# EAGLE board circuitdraft (EAGLE 9.5.1)
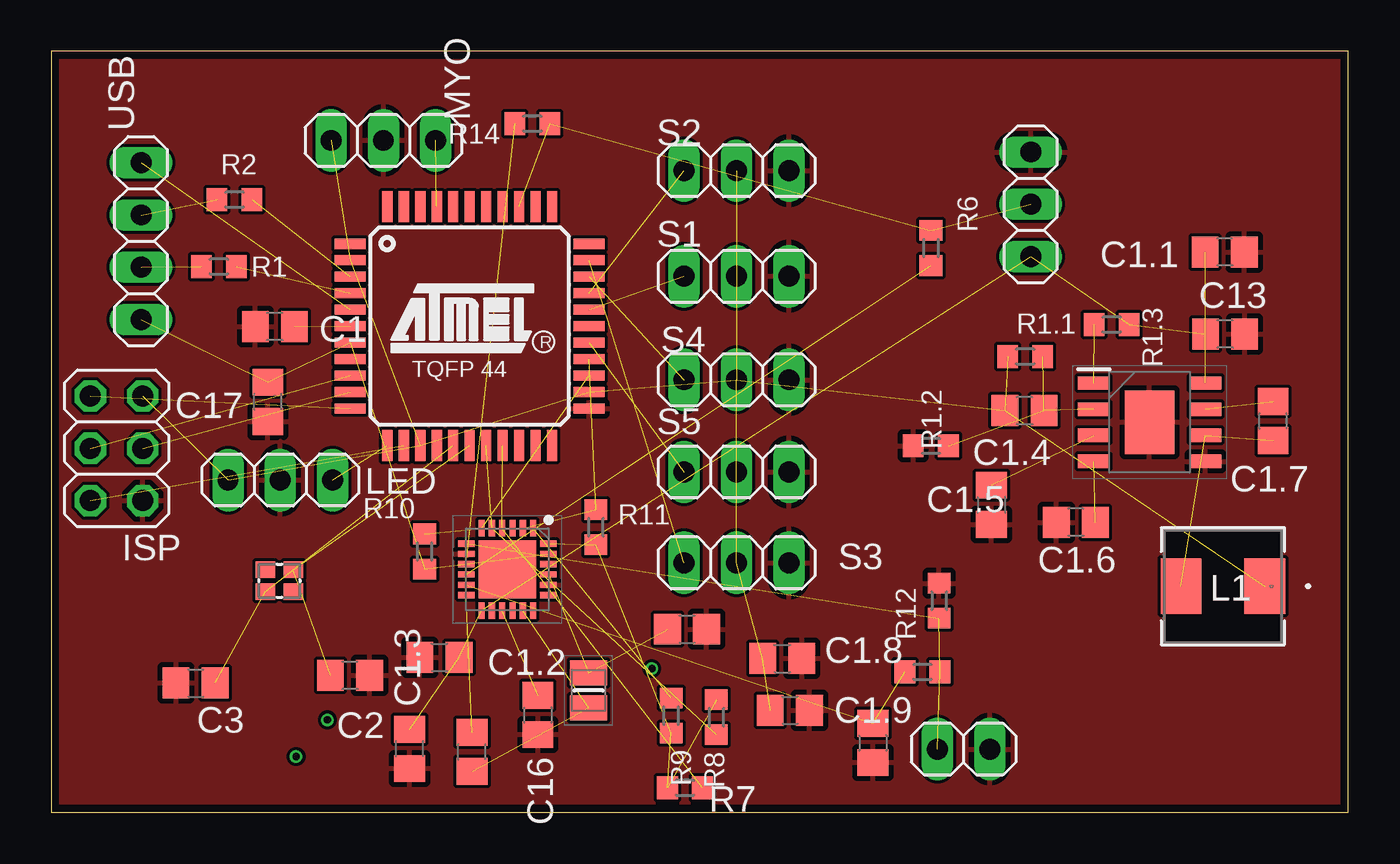
[diagram p0: board, top side]
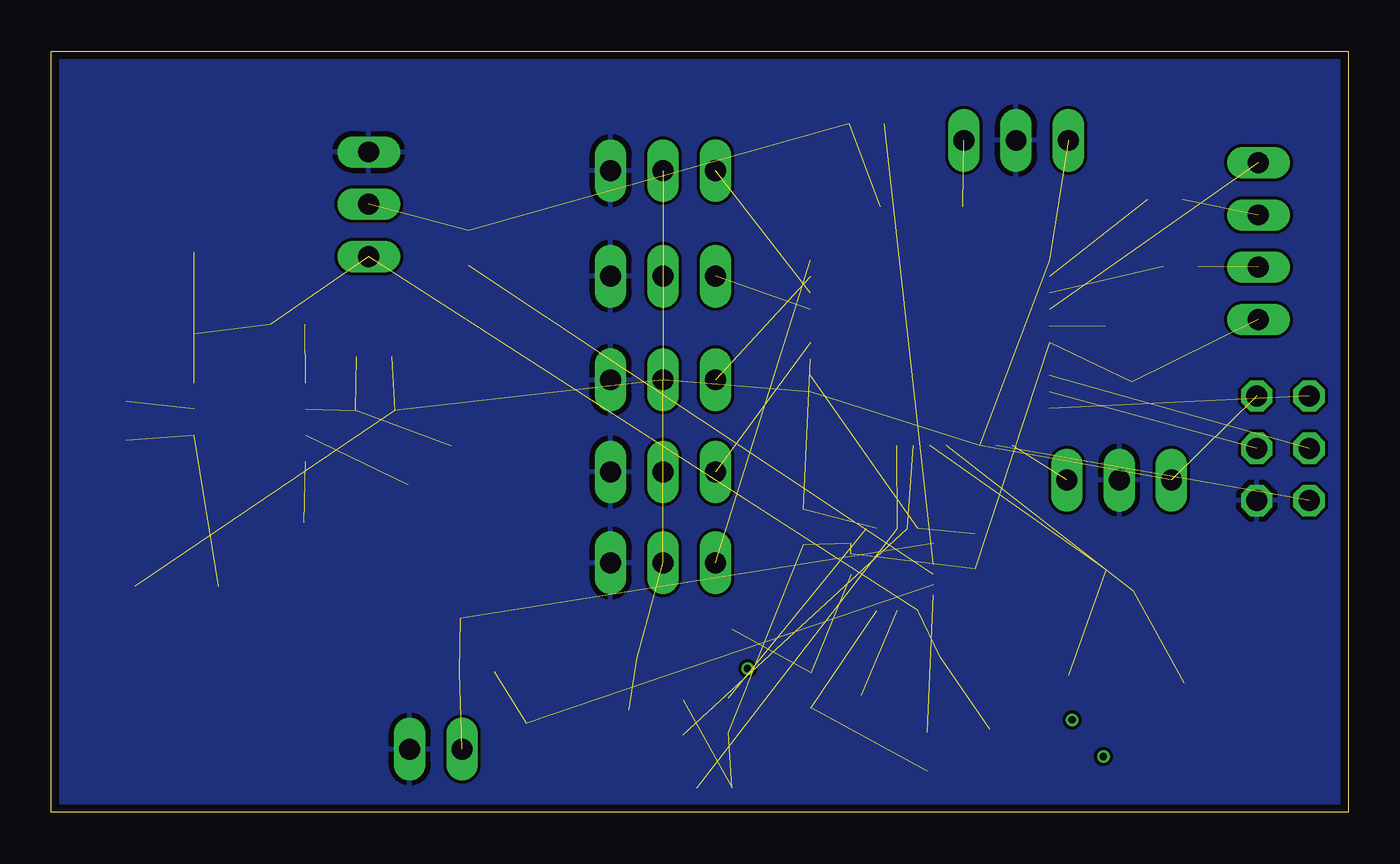
[diagram p1: board, bottom side, seen from below]

Size 62.97 x 36.97 mm. Coordinates in mm from the lower left corner, seen from the top.
Outline: 0,0 62.97,0 62.97,36.97 0,36.97 0,0
Copper layers (1*16): Top 0.035559375mm / dielectric 1.6mm / Bottom 0.035559375mm
Design rules "oshpark-2layer *": minimum track width 6mil, minimum drill 10mil, track to track 6mil, track to pad 6mil, pad to pad 6mil, via to via 6mil, smd to smd 6mil, copper to edge 15mil, drill to drill 6mil, minimum pad ring 5mil, minimum via ring 5mil, stop-mask expansion 2.5mil, vias tented up to drill 30mil, thermal gap 10mil

## Footprints (pad centres in the part's own frame; a part is rotated, then mirrored left to right if it is on the bottom)
1X03 = drill 1.016 long: 1 -2.54,0; 2 0,0; 3 2.54,0
C0805 = smd 1.3 x 1.5: 1 -0.95,0; 2 0.95,0
QFN50P400X400X100-25N = smd 0.8 x 0.3: 1 -2,1.25; 2 -2,0.75; 3 -2,0.25; 4 -2,-0.25; 5 -2,-0.75; 6 -2,-1.25; 13 2,-1.25; 14 2,-0.75; 15 2,-0.25; 16 2,0.25; 17 2,0.75; 18 2,1.25 | smd 0.3 x 0.8: 7 -1.25,-2; 8 -0.75,-2; 9 -0.25,-2; 10 0.25,-2; 11 0.75,-2; 12 1.25,-2; 19 1.25,2; 20 0.75,2; 21 0.25,2; 22 -0.25,2; 23 -0.75,2; 24 -1.25,2 | smd 2.8 x 2.8: 25 0,0
SOIC127P600X170-9N = smd 1.525 x 0.65: 1 -2.712,1.905; 2 -2.712,0.635; 3 -2.712,-0.635; 4 -2.712,-1.905; 5 2.712,-1.905; 6 2.712,-0.635; 7 2.712,0.635; 8 2.712,1.905 | smd 2.4 x 3.1: 9 0,0
2X03 = drill 1.016 octagon: 1 -2.54,-1.27; 2 -2.54,1.27; 3 0,-1.27; 4 0,1.27; 5 2.54,-1.27; 6 2.54,1.27
IND_IHLP-2020CZ = smd 1.981 x 2.692: 1 -2.032,0; 2 2.032,0
INDC2016X100N = smd 1.2 x 1.8: 1 -0.85,0; 2 0.85,0
2.0X1.6_KX-5 = smd 0.95 x 0.8: 1 -0.675,-0.525; 2 0.675,-0.525; 3 0.675,0.525; 4 -0.675,0.525
R0603 = smd 1 x 1.1: 1 -0.85,0; 2 0.85,0
1X02 = drill 1.016 long: 1 -1.27,0; 2 1.27,0
TQFP44 = smd 1.5 x 0.5: 1 -5.8,4; 2 -5.8,3.2; 3 -5.8,2.4; 4 -5.8,1.6; 5 -5.8,0.8; 6 -5.8,0; 7 -5.8,-0.8; 8 -5.8,-1.6; 9 -5.8,-2.4; 10 -5.8,-3.2; 11 -5.8,-4; 23 5.8,-4; 24 5.8,-3.2; 25 5.8,-2.4; 26 5.8,-1.6; 27 5.8,-0.8; 28 5.8,0; 29 5.8,0.8; 30 5.8,1.6; 31 5.8,2.4; 32 5.8,3.2; 33 5.8,4 | smd 0.5 x 1.5: 12 -4,-5.8; 13 -3.2,-5.8; 14 -2.4,-5.8; 15 -1.6,-5.8; 16 -0.8,-5.8; 17 0,-5.8; 18 0.8,-5.8; 19 1.6,-5.8; 20 2.4,-5.8; 21 3.2,-5.8; 22 4,-5.8; 34 4,5.8; 35 3.2,5.8; 36 2.4,5.8; 37 1.6,5.8; 38 0.8,5.8; 39 0,5.8; 40 -0.8,5.8; 41 -1.6,5.8; 42 -2.4,5.8; 43 -3.2,5.8; 44 -4,5.8
1X04 = drill 1.016 long: 1 -3.81,0; 2 -1.27,0; 3 1.27,0; 4 3.81,0

## Placement (x,y rotation side)
BATIO  [1X03]  47.56,29.55 90 top
C1  1 uF  [C0805]  10.85,23.61 180 top
C1.1  10 uF  [C0805]  56.98,27.23 180 top
C1.2  10 uF  [C0805]  18.84,7.54 0 top
C1.3  .1 uF  [C0805]  17.39,3.09 90 top
C1.4  10 pF  [C0805]  47.26,19.52 180 top
C1.5  1 uF  [C0805]  45.65,14.95 270 top
C1.6  8200 pF  [C0805]  49.75,14.1 180 top
C1.7  0.1 uF  [C0805]  59.33,19.02 90 top
C1.8  22 uF  [C0805]  35.49,7.48 0 top
C1.9  22 uF  [C0805]  35.86,4.97 0 top
C2  22pF  [C0805]  14.5,6.66 180 top
C3  22 pF  [C0805]  7,6.29 0 top
C13  1 uF  [C0805]  57,23.24 180 top
C14  4.7 uF  [C0805]  39.89,3.38 270 top
C15  47 nF  [C0805]  20.42,2.95 90 top
C16  44 uF  [C0805]  23.62,4.74 270 top
C17  1 uF  [C0805]  10.51,19.95 90 top
C18  10 uF  [C0805]  30.87,8.91 0 top
IC1  BQ25887RGER  [QFN50P400X400X100-25N]  22.14,11.81 270 top
IC2  TPS54627DDAR  [SOIC127P600X170-9N]  53.33,18.96 0 top
ISP  [2X03]  3.16,17.69 270 top
L1  IHLP2020CZER3R3M01  [IND_IHLP-2020CZ]  56.89,10.99 180 top
L2  1 uH  [INDC2016X100N]  26.08,5.93 270 top
LED  [1X03]  11.11,16.15 0 top
MYO  [1X03]  16.12,32.65 0 top
Q1  16 MHz  [2.0X1.6_KX-5]  11.07,11.26 0 top
R1  22 Ohms  [R0603]  8.13,26.52 0 top
R1.1  124000 Ohms  [R0603]  47.29,22.15 0 top
R1.2  22100 Ohms  [R0603]  42.71,17.81 180 top
R1.3  10000 Ohms  [R0603]  51.49,23.7 180 top
R2  22 Ohms  [R0603]  8.89,29.77 0 top
R6  12 Ohms  [R0603]  42.71,27.42 270 top
R7  10000 Ohms  [R0603]  30.77,1.2 180 top
R8  10000 Ohms  [R0603]  32.29,4.63 90 top
R9  10000 Ohms  [R0603]  30.09,4.71 270 top
R10  10000 Ohms  [R0603]  18.12,12.68 270 top
R11  10000 Ohms  [R0603]  26.44,13.86 270 top
R12  30.1 kOhms  [R0603]  43.11,10.29 270 top
R13  5.23 kOhms  [R0603]  42.3,6.83 180 top
R14  300 Ohms  [R0603]  23.36,33.46 180 top
S1  [1X03]  33.27,26.05 0 top
S2  [1X03]  33.27,31.18 0 top
S3  [1X03]  33.27,12.13 0 top
S4  [1X03]  33.27,21.02 0 top
S5  [1X03]  33.27,16.54 0 top
TS  [1X02]  44.3,3.08 0 top
U$1  ATMEGA32U4-AU  [TQFP44]  20.31,23.63 0 top
USB  [1X04]  4.35,27.76 90 top

## Library data of the parts
BATIO ISP LED MYO S1-S5 TS USB = pinhead
C1 C1.1-C1.9 C2 C3 C13-C18 = rcl; SPICEPREFIX: C
IC1 = SamacSys_Parts; DESCRIPTION: I2C Controlled, 2-cell, 2-A boost-mode battery charger with cell balancing; HEIGHT: 1mm; MANUFACTURER_NAME: Texas Instruments; MANUFACTURER_PART_NUMBER: BQ25887RGER; MOUSER_PART_NUMBER: 595-BQ25887RGER; MOUSER_PRICE-STOCK: https://www.mouser.com/Search/Refine.aspx?Keyword=595-BQ25887RGER
IC2 = TPS54627DDAR; DESCRIPTION: 4.5V to 18V Input, 6-A Synchronous Step-Down Converter; HEIGHT: 1.7mm; MANUFACTURER_NAME: Texas Instruments; MANUFACTURER_PART_NUMBER: TPS54627DDAR; MOUSER_PART_NUMBER: 595-TPS54627DDAR; MOUSER_PRICE-STOCK: https://www.mouser.com/Search/Refine.aspx?Keyword=595-TPS54627DDAR
L1 = ind2; MANUFACTURER_PART_NUMBER: IHLP2020CZER3R3M01; VENDOR: VISHAY
L2 = SamacSys_Parts; DESCRIPTION: Fixed Inductors 1.0uH 50mOhms 3.6A 20%; HEIGHT: 1mm; MANUFACTURER_NAME: TDK; MANUFACTURER_PART_NUMBER: TFM201610GHM-1R0MTAA; MOUSER_PART_NUMBER: 810-TFM201610GHM1R0A; MOUSER_PRICE-STOCK: https://www.mouser.com/Search/Refine.aspx?Keyword=810-TFM201610GHM1R0A
Q1 = crystal-geyer_V1_0
R1 R1.1-R1.3 R2 R6-R14 = rcl; SPICEPREFIX: R
U$1 = mega32U4

## Nets
AGND: BATIO.3 C1.1.1 C1.2 C1.2.1 C1.3.1 C1.5.2 C1.6.2 C1.8.2 C1.9.2 C2.1 C3.1 C13.1 C14.2 C16.2 C17.1 C18.2 IC1.8 IC1.20 IC2.5 IC2.9 ISP.6 LED.2 MYO.2 R1.2.2 R12.1 S1.3 S2.3 S3.3 S4.3 S5.3 TS.2 U$1.23
B+: BATIO.1 C1.1.2 C1.2.2 C1.3.2 C13.2 IC1.13 IC2.8 R1.3.1
BTST: C15.2 IC1.12
D+: R1.1 USB.2
D-: R2.1 USB.3
DATAIN: LED.3 U$1.12
INT: IC1.6 R10.1 U$1.25
MIDDLE: BATIO.2 R6.1 R14.1 U$1.36
MISO: ISP.1 U$1.11
MOSI: ISP.4 U$1.10
MYOSIGNAL: MYO.3 U$1.41
N$1: IC2.1 R1.3.2
N$2: R2.2 U$1.3
N$3: IC1.10 R6.2
N$4: R1.2 U$1.4
N$5: C3.2 Q1.1 U$1.16
N$6: C2.2 Q1.3 U$1.17
N$7: IC1.1 R9.1
N$8: C1.1 U$1.6
N$9: C1.6.1 IC2.4
N$10: IC1.9 R14.2
N$11: C1.4.1 IC2.2 R1.1.2 R1.2.1
N$13: C1.5.1 IC2.3
N$14: C1.7.1 IC2.6 L1.2
N$15: C1.7.2 IC2.7
N$18: C15.1 IC1.17 L2.2
N$19: C14.1 IC1.11 R13.2
N$20: C16.1 IC1.15
N$21: C18.1 IC1.21 L2.1
POWER: C1.4.2 C1.8.1 C1.9.1 ISP.2 L1.1 LED.1 MYO.1 R1.1.1 S1.2 S2.2 S3.2 S4.2 S5.2 U$1.2 U$1.14 U$1.24
RST: ISP.5 U$1.13
SCK: ISP.3 U$1.9
SCL: IC1.5 R8.1 U$1.18
SDA: IC1.4 R7.1 U$1.19
SIGNAL1: S1.1 U$1.29
SIGNAL2: S2.1 U$1.30
SIGNAL3: S3.1 U$1.32
SIGNAL4: S4.1 U$1.31
SIGNAL5: S5.1 U$1.27
STAT: IC1.2 R11.1 U$1.26
TS: IC1.7 R12.2 R13.1 TS.1
UGND: U$1.5 USB.4
VBUS: C17.2 IC1.23 IC1.24 R7.2 R8.2 R9.2 R10.2 R11.2 U$1.7 USB.1

## Tracks (layer width: path | path; a pad name or v marks a point on that pad's centre or on a via)
AGND
  pour Top: 0,0 0,36.97 62.97,36.97 62.97,0
  pour Bottom: 0,0 0,36.97 62.97,36.97 62.97,0
B+  (7 unrouted)
BTST  (1 unrouted)
D+  (1 unrouted)
D-  (1 unrouted)
DATAIN  (1 unrouted)
INT  (2 unrouted)
MIDDLE  (3 unrouted)
MISO  (1 unrouted)
MOSI  (1 unrouted)
MYOSIGNAL  (1 unrouted)
N$1  (1 unrouted)
N$2  (1 unrouted)
N$3  (1 unrouted)
N$4  (1 unrouted)
N$5  (2 unrouted)
N$6  (2 unrouted)
N$7  (1 unrouted)
N$8  (1 unrouted)
N$9  (1 unrouted)
N$10  (1 unrouted)
N$11  (3 unrouted)
N$12  (via drill 0.35)
  other vias: 13.4,4.5
N$13  (1 unrouted)
N$14  (2 unrouted)
N$15  (1 unrouted)
N$16  (via drill 0.35)
  other vias: 29.16,6.99
N$17  (via drill 0.35)
  other vias: 11.88,2.72
N$18  (2 unrouted)
N$19  (2 unrouted)
N$20  (1 unrouted)
N$21  (2 unrouted)
POWER  (15 unrouted)
RST  (1 unrouted)
SCK  (1 unrouted)
SCL  (2 unrouted)
SDA  (2 unrouted)
SIGNAL1  (1 unrouted)
SIGNAL2  (1 unrouted)
SIGNAL3  (1 unrouted)
SIGNAL4  (1 unrouted)
SIGNAL5  (1 unrouted)
STAT  (2 unrouted)
TS  (3 unrouted)
UGND  (1 unrouted)
VBUS  (9 unrouted)